# EAGLE board pendulum (EAGLE 7.6.0)
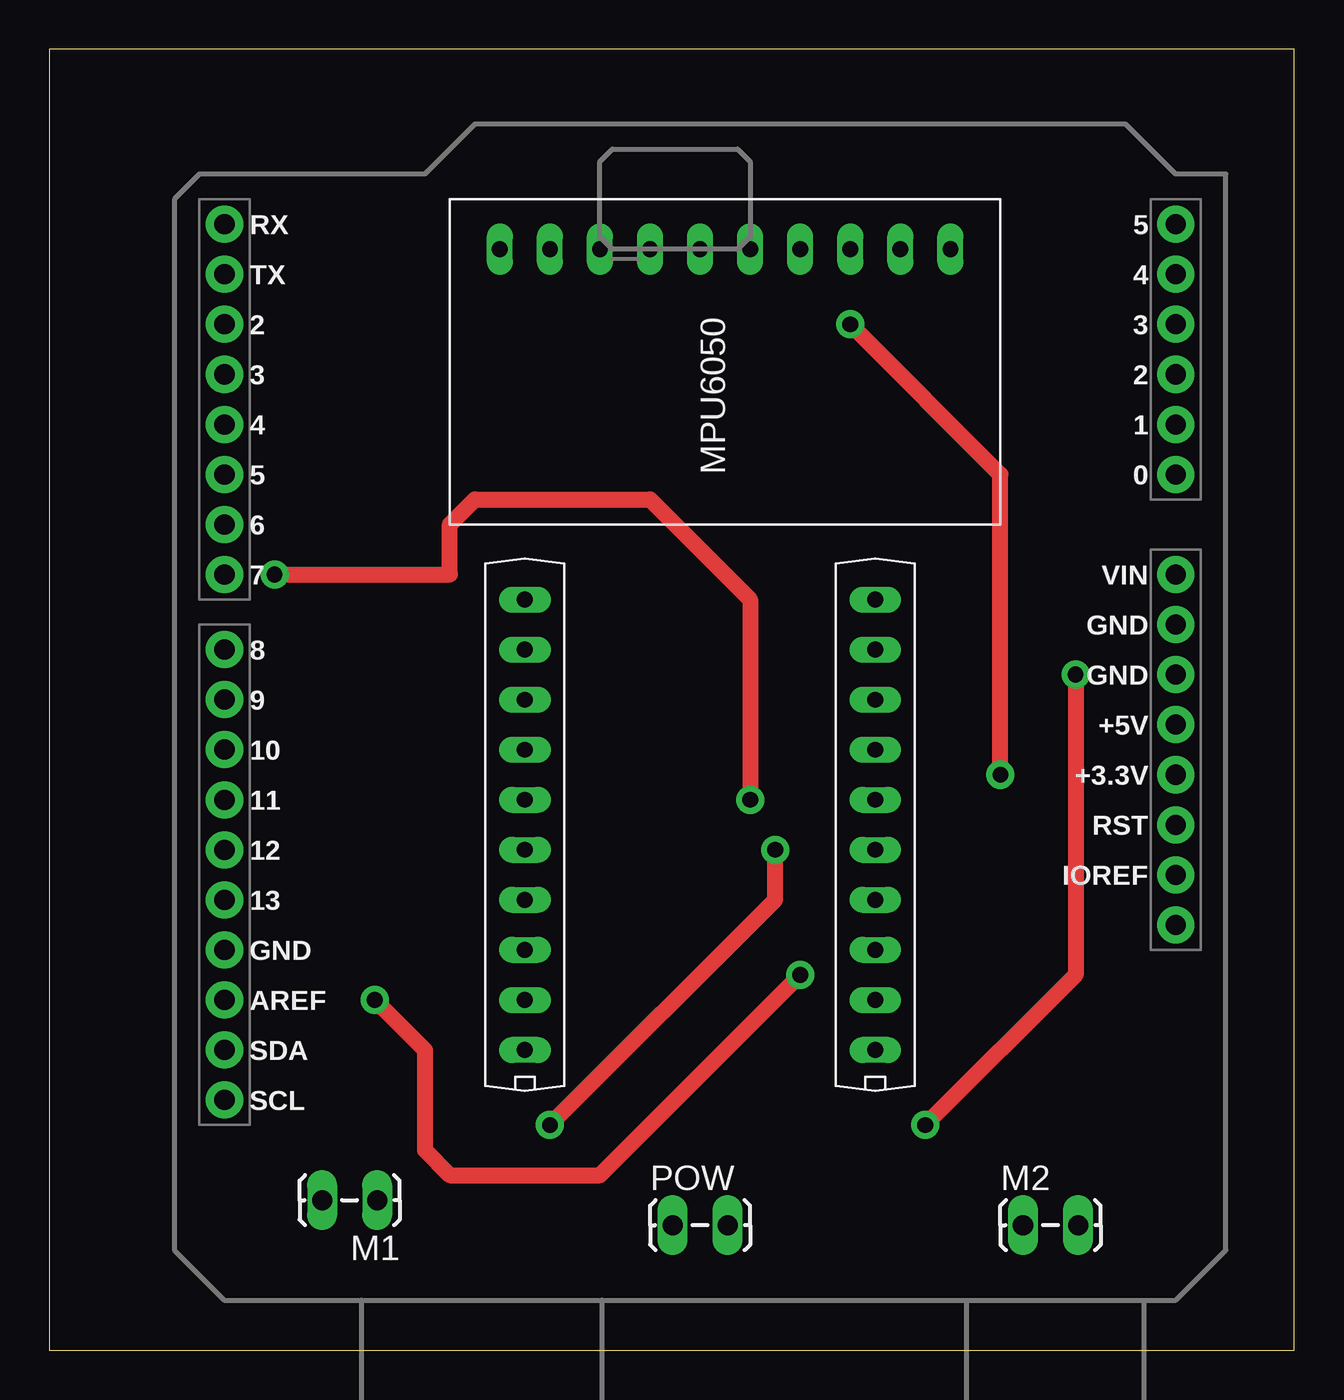
[diagram p0: board, top side]
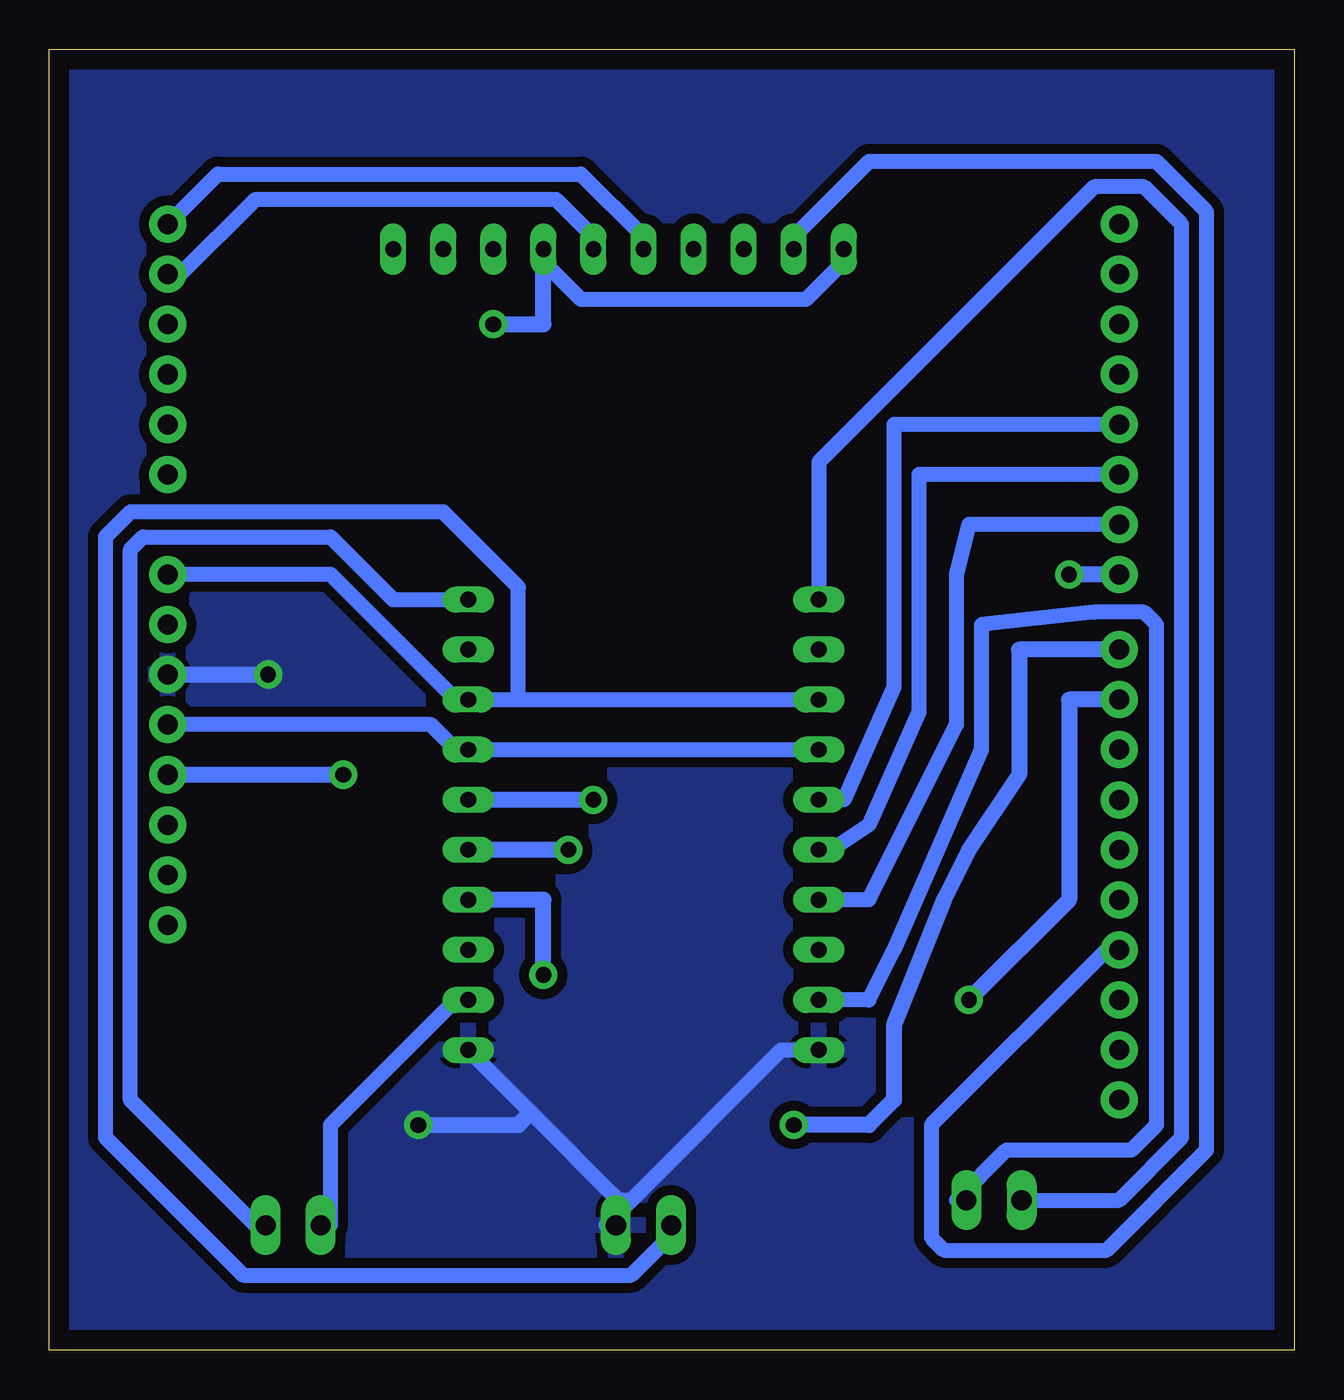
[diagram p1: board, bottom side, seen from below]

Size 63.17 x 66.03 mm. Coordinates in mm from the lower left corner, seen from the top.
Outline: 0,0 63.17,0 63.17,66.03 0,66.03 0,0
Copper layers (1*16): Top 0.035mm / dielectric 1.5mm / Bottom 0.035mm
Design rules "default *": minimum track width 30mil, minimum drill 24mil, track to track 20mil, track to pad 20mil, pad to pad 20mil, via to via 20mil, smd to smd 20mil, copper to edge 40mil, drill to drill 8mil, minimum pad ring 10mil, minimum via ring 8mil, stop-mask expansion 4mil, vias tented up to drill 0mil, thermal gap 10mil

## Footprints (pad centres in the part's own frame; a part is rotated, then mirrored left to right if it is on the bottom)
UNO_R3_SHIELD = drill 1.016 pad 1.88: 3.3V 50.8,26.67; 5V 50.8,29.21; A0 50.8,41.91; A1 50.8,44.45; A2 50.8,46.99; A3 50.8,49.53; A4 50.8,52.07; A5 50.8,54.61; AREF 2.54,15.24; D2 2.54,49.53; D3 2.54,46.99; D4 2.54,44.45; D5 2.54,41.91; D6 2.54,39.37; D7 2.54,36.83; D8 2.54,33.02; D9 2.54,30.48; D10 2.54,27.94; D11 2.54,25.4; D12 2.54,22.86; D13 2.54,20.32; GND@0 50.8,31.75; GND@1 50.8,34.29; GND@2 2.54,17.78; IOREF 50.8,21.59; NC 50.8,19.05; RES 50.8,24.13; RX 2.54,54.61; SCL 2.54,10.16; SDA 2.54,12.7; TX 2.54,52.07; VIN 50.8,36.83
1X02_LOCK_LONGPADS = drill 1.016 long: 1 -0.127,0; 2 2.667,0
MPU6050 = drill 0.8 long: ASCL 5.08,-8.89; ASDA 5.08,-11.43; CLK 5.08,-6.35; GND 5.08,8.89; INT 5.08,6.35; SCL 5.08,1.27; SDA 5.08,-1.27; SYNC 5.08,3.81; VDD 5.08,11.43; VIO 5.08,-3.81
HSIP10 = drill 0.8 long: 1 -11.43,0; 2 -8.89,0; 3 -6.35,0; 4 -3.81,0; 5 -1.27,0; 6 1.27,0; 7 3.81,0; 8 6.35,0; 9 8.89,0; 10 11.43,0

## Placement (x,y rotation side)
J1  ARDUINO_R3_SHIELD  [UNO_R3_SHIELD]  6.35,2.54 0 top
M1  [1X02_LOCK_LONGPADS]  16.51,7.62 180 top
M2  [1X02_LOCK_LONGPADS]  49.53,6.35 0 top
POW  [1X02_LOCK_LONGPADS]  31.75,6.35 0 top
U$1  MPU6050  [MPU6050]  34.29,50.8 90 top
U$2  TA7291  [HSIP10]  24.13,26.67 90 top
U$3  TA7291  [HSIP10]  41.91,26.67 90 top

## Library data of the parts
J1 = SparkFun-Boards
M1 M2 POW = SparkFun-Connectors
U$1 = inv_pendulum
U$2 U$3 = TA7291P

## Nets
GND: J1.GND@0 POW.2 U$2.1 U$3.1
N$1: J1.A4 U$1.SDA
N$2: J1.A5 U$1.SCL
N$3: J1.GND@2 U$1.GND
N$4: M1.1 U$2.2
N$5: J1.3.3V U$1.VDD U$1.VIO
N$6: M1.2 U$2.10
N$7: M2.1 U$3.2
N$8: M2.2 U$3.10
N$9: J1.VIN POW.1 U$2.8 U$3.8
N$10: J1.D6 U$2.4
N$11: J1.D9 U$3.4
N$12: J1.D5 U$2.5
N$13: J1.D4 U$2.6
N$14: J1.D8 U$3.5
N$15: J1.D7 U$3.6
N$17: J1.5V U$2.7 U$3.7

## Tracks (layer width: path | path; a pad name or v marks a point on that pad's centre or on a via)
GND  (via drill 0.8 pad 1.42)
  Top 0.813: v52.07,34.29 52.07,19.05 v44.45,11.43
  Bottom 0.762: U$2.1 26.04,15.24 33.66,7.62 | 33.66,7.62 34.92,6.35 POW.2 | U$3.1 38.73,12.06 34.29,7.62 33.66,7.62
  Bottom 0.813: J1.GND@0 v52.07,34.29 | v44.45,11.43 39.37,11.43 38.73,12.06
  pour Bottom: 0,0 63.5,0 63.5,66.04 0,66.04
N$1
  Bottom 0.762: U$1.SDA 35.56,56.52 37.47,58.42 52.7,58.42 56.52,54.61 J1.A4
N$2
  Bottom 0.762: U$1.SCL 33.02,56.52 36.2,59.69 54.61,59.69 J1.A5
N$3
  Bottom 0.762: U$1.GND 25.4,56.52 21.59,60.33 6.99,60.33 4.45,57.78 4.45,10.16 9.53,5.08 17.78,5.08 18.41,5.71 18.41,11.43 9.53,20.32 J1.GND@2
N$4
  Bottom 0.762: U$2.2 21.59,17.78 20.32,20.32 15.88,30.48 15.88,36.83 10.16,37.47 7.62,37.47 6.99,36.83 6.99,11.43 8.26,10.16 14.61,10.16 17.14,7.62 M1.1
N$5  (via drill 0.8 pad 1.42)
  Top 0.813: v48.26,29.21 48.26,44.45 v40.64,52.07
  Bottom 0.762: U$1.VDD 22.86,55.24 24.77,53.34 36.2,53.34 38.1,55.24 U$1.VIO
  Bottom 0.813: J1.3.3V v48.26,29.21 | v40.64,52.07 38.1,52.07 U$1.VIO
N$6
  Bottom 0.762: U$2.10 24.13,45.09 10.16,59.05 7.62,59.05 5.71,57.15 5.71,10.79 8.89,7.62 M1.2
N$7
  Bottom 0.762: U$3.2 42.55,17.78 48.9,11.43 48.9,6.35 M2.1
N$8
  Bottom 0.762: U$3.10 45.72,38.1 48.9,41.27 58.42,41.27 59.05,40.64 59.05,12.7 52.7,6.35 M2.2
N$9
  Bottom 0.762: 39.37,33.02 U$3.8 42.55,33.02 48.9,39.37 J1.VIN | 39.37,33.02 U$2.8 | 39.37,33.02 39.37,38.73 43.18,42.55 59.05,42.55 60.33,41.27 60.33,10.79 53.34,3.81 33.66,3.81 31.75,5.71 31.75,6.35 POW.1
N$10
  Bottom 0.762: U$2.4 21.59,22.86 17.14,31.75 17.14,39.37 16.51,41.91 J1.D6
N$11  (via drill 0.8 pad 1.42)
  Top 0.813: v16.51,17.78 19.05,15.24 19.05,10.16 20.32,8.89 27.94,8.89 v38.1,19.05
  Bottom 0.813: J1.D9 11.43,33.02 11.43,22.86 v16.51,17.78 | v38.1,19.05 38.1,22.86 U$3.4
N$12
  Bottom 0.762: U$2.5 23.5,25.4 21.59,26.67 19.05,32.38 19.05,44.45 J1.D5
N$13
  Bottom 0.762: U$2.6 22.86,27.94 20.32,33.66 20.32,46.99 J1.D4
N$14  (via drill 0.8 pad 1.42)
  Top 0.813: v25.4,11.43 36.83,22.86 v36.83,25.4
  Bottom 0.813: J1.D8 13.97,35.56 13.97,29.21 16.51,25.4 17.78,22.86 20.32,16.51 20.32,12.7 21.59,11.43 v25.4,11.43 | v36.83,25.4 U$3.5
N$15  (via drill 0.8 pad 1.42)
  Top 0.813: v11.43,39.37 20.32,39.37 20.32,41.91 21.59,43.18 30.48,43.18 35.56,38.1 v35.56,27.94
  Bottom 0.813: J1.D7 v11.43,39.37 | v35.56,27.94 U$3.6
N$17
  Bottom 0.762: U$2.7 U$3.7 42.55,30.48 43.81,31.75 J1.5V